# Altium PCB Flyback_PCB.PcbDoc
Units mm, origin at the board's own origin, x right, y up, seen from the top; angles counter-clockwise.
Board outline 112.01 x 26.16 mm, 2 copper layers (Top Layer, Bottom Layer); 26 components, 14 nets, 67 pads, 8 vias.
Unrouted connection lines stored in the file: 4.
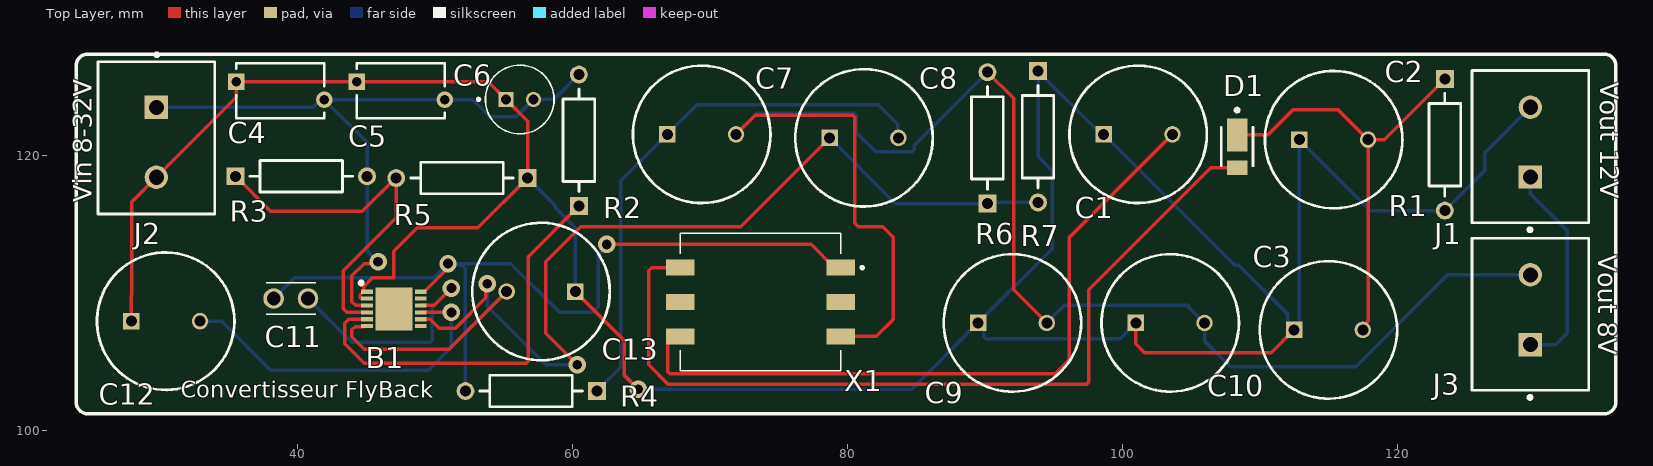
[diagram p0: Top Layer view]
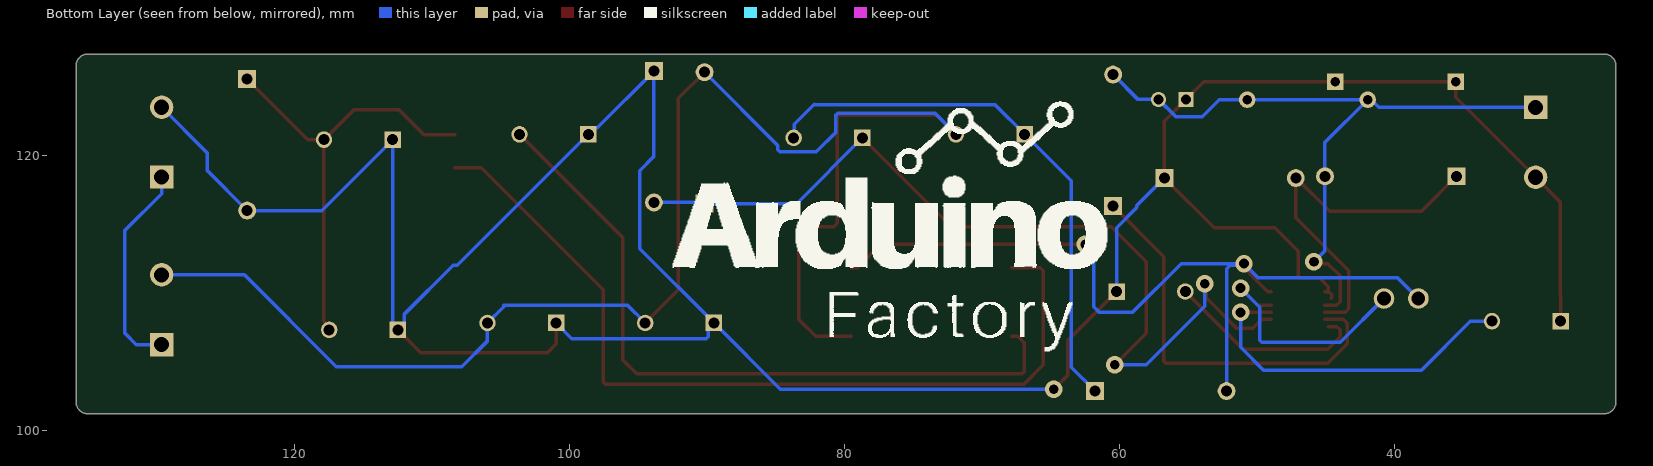
[diagram p1: Bottom Layer view, seen from below]

## Layer stack, top to bottom
Top Solder: solder mask 0.0102, Solder Resist, Dk 3.5
Top Layer: signal copper 0.0356
Dielectric 1: dielectric 0.32, FR-4, Dk 4.8
Bottom Layer: signal copper 0.0356
Bottom Solder: solder mask 0.0102, Solder Resist, Dk 3.5

## Board outline
23.876,102.073 23.876,126.527 cw(c24.73,126.527) 24.73,127.381 135.036,127.381 cw(c135.036,126.527) 135.89,126.527 135.89,102.073 cw(c135.036,102.073) 135.036,101.219 24.73,101.219 cw(c24.73,102.073)

## Design rules (kind name [scope] priority, off if disabled: settings)
Clearance Clearance_1 [OnMid vs OnMid] p1: gap=0.254 ignorepadtopadclearanceinfootprint=FALSE sourcerule=36 cellrowname=All cellrowtype=0 cellcolname=All cellcoltype=0 innerlayers=TRUE
Clearance Clearance_2 [(ExistsOnLayer('Top Layer') Or ExistsOnLayer('Bottom Layer')) vs (ExistsOnLayer('Top Layer') Or ExistsOnLayer('Bottom Layer'))] p2: gap=0.254 ignorepadtopadclearanceinfootprint=FALSE sourcerule=36 cellrowname=All cellrowtype=0 cellcolname=All cellcoltype=0 outerlayers=TRUE
Clearance [All] p3: gap=0.254 ignorepadtopadclearanceinfootprint=FALSE ismatrix=TRUE
ComponentClearance [All] p1: gap=0 collisioncheckmode=3 verticalgap=0 showdistances=FALSE
PolygonConnect [All] p1: connectstyle=Relief reliefconductorwidth=0.254 reliefentries=4 polygonreliefangle="90 Angle" airgapwidth=0.254
RoutingVias [All] p1: holewidth=0.711 width=1.27 viastyle="Through Hole" minholewidth=0.711 minwidth=1.27 maxholewidth=0.711 maxwidth=1.27
SolderMaskExpansion [All] p1: expansion=0.102 istentingtop=FALSE
Width [All] p1: maxlimit=0.254 minlimit=0.254 preferedwidth=0.254
29 further rules are at their usual default settings.

## Components (designator, comment, footprint, x,y, rotation, side; value= is the part's Value field where it differs from the comment)
B1 "LM5160ADNTT" SON50P400X400X100-13N 46.99,108.839 r0 top
C1 "2200pF" CAPPRD500W60D1000H1350 98.632,121.539 r0 top
C2 "10uF" CAPPRD500W60D1000H1350 112.856,121.158 r0 top
C3 "10uF" CAPPRD500W60D1000H1350 112.475,107.315 r0 top
C4 "2.2uF" Vishay_561R_0 38.735,124.714 r0 top
C5 "2.2uF" Vishay_561R_0 47.498,124.714 r0 top
C6 "0.47uF" CAPPRD200W50D550H1250 56.15,124.079 r0 top
C7 "1000pF" CAPPRD500W60D1000H1350 66.882,121.539 r0 top
C8 "0.1uF" CAPPRD500W60D1000H1350 78.693,121.285 r0 top
C9 "10 uF" CAPPRD500W60D1000H1350 89.488,107.823 r0 top
C10 "10 uF" CAPPRD500W60D1000H1350 100.965,107.823 r0 top
C11 "0.01uF" K104K10X7RF53H5 39.497,109.601 r0 top
C12 "1uF" CAPPRD500W60D1000H1350 27.893,107.95 r0 top
C13 "0.082uF" CAPPRD500W60D1000H1350 60.198,110.109 r180 top
D1 "Diode_Diodes_DFLS1100-7_eec" Diodes_DFLS1100-7_0 108.331,120.65 r90 top
J1 "282837-2" TE_282837-2_0 129.667,120.65 r90 top
J2 "282837-2" TE_282837-2_0 29.718,121.285 r270 top
J3 "282837-2" TE_282837-2_0 129.667,108.458 r90 top
R1 "2 Kohms" Stackpole_Electronics_Inc._CF14JT1K00_0 123.444,120.777 r270 top
R2 "301K" Stackpole_Electronics_Inc._CF14JT1K00_0 60.452,121.112 r90 top
R3 "127K" Stackpole_Electronics_Inc._CF14JT1K00_0 40.259,118.491 r0 top
R4 "51.1 Kohms" Stackpole_Electronics_Inc._CF14JT1K00_0 56.977,102.87 r180 top
R5 "10K" Stackpole_Electronics_Inc._CF14JT1K00_0 51.943,118.364 r180 top
R6 "6.04 Kohms" Stackpole_Electronics_Inc._CF14JT1K00_0 90.17,121.285 r90 top
R7 "2 Kohms" Stackpole_Electronics_Inc._CF14JT1K00_0 93.853,121.366 r270 top
X1 "750314597" 750314597 73.66,109.347 r180 top

## Footprints (in the part's own frame and the unit in brackets; to place one, negate y for a bottom-side part, rotate by r counter-clockwise, add the part's x,y. Pads: shape width x height; smd on the part's side, far side on the other; paste and mask are expansions set on the pad)
750314597 [mm]
  rect 2.08x1.17 smd: 1(-5.83,-2.5) 2(-5.83,0) 3(-5.83,2.5) 4(5.83,2.5) 5(5.83,0) 6(5.83,-2.5)
  silkscreen extent -7.5,-5 5.83,5
CAPPRD200W50D550H1250 [mm]
  rect 1.12x1.12 hole 0.72: 1(-1,0)
  round 1.12 hole 0.72: 2(1,0)
  silkscreen extent -3.1,-2.5 2.5,2.5
CAPPRD500W60D1000H1350 [mm]
  rect 1.2x1.2 / inner round 1.2 / far side rect 1.2x1.2 hole 0.8: 1(0,0)
  round 1.2 hole 0.8: 2(5,0)
  silkscreen extent -2.5,-5 7.5,5
Diodes_DFLS1100-7_0 [mm]
  rect 2.4x1.5 smd paste+0 mask+0: 1(0.85,0)
  rect 1.05x1.5 smd paste+0 mask+0: 2(-1.525,0)
  silkscreen extent -1.4,-1.15 2.77,1.15, body extent -2.15,-1.06 2.15,1.06, height 0.25
K104K10X7RF53H5 [mm]
  round 1.5 hole 1: 1(-1.25,0) 2(1.25,0)
  silkscreen extent -1.8,-1.15 1.8,1.15
SON50P400X400X100-13N [mm]
  rect 0.85x0.3 smd: 1(-1.95,1.25) 2(-1.95,0.75) 3(-1.95,0.25) 4(-1.95,-0.25) 5(-1.95,-0.75) 6(-1.95,-1.25) 7(1.95,-1.25) 8(1.95,-0.75) 9(1.95,-0.25) 10(1.95,0.25) 11(1.95,0.75) 12(1.95,1.25)
  rect 2.7x3.1 smd: 13(0,0)
  silkscreen extent -2.5,1.78 -2.25,2.02
Stackpole_Electronics_Inc._CF14JT1K00_0 [mm]
  rect 1.3x1.3 hole 0.8 paste-2539.97 mask+0: 1(-4.78,0)
  round 1.3 hole 0.8 paste-2539.97 mask+0: 2(4.78,0)
  silkscreen extent -3.73,-1.15 3.73,1.15, body extent -5.53,-1.4 5.53,1.4, height 0.25
TE_282837-2_0 [mm]
  rect 1.7x1.7 hole 1.1 paste-2539.97 mask+0: 1(-2.215,0)
  round 1.7 hole 1.1 paste-2539.97 mask+0: 2(2.865,0)
  silkscreen extent -6.17,-4.25 5.53,4.25, body extent -5.63,-4.35 5.63,4.35, height 0.25
Vishay_561R_0 [mm]
  rect 1.2x1.2 hole 0.7 paste-2539.97 mask+0: 1(-3.2,0.65)
  round 1.2 hole 0.7 paste-2539.97 mask+0: 2(3.2,-0.65)
  silkscreen extent -3.2,-2 3.2,2

## Part data
B1: "LM5160A Wide Input 65V, 2A Synchronous Buck / Fly-Buck Converter", Manufacturer_Name="Texas Instruments", Mouser Part Number=595-LM5160ADNTT, Arrow Part Number=LM5160ADNTT, Arrow Price/Stock=https://www.arrow.com/en/products/lm5160adntt/texas-instruments?region=nac, Datasheet Link=http://www.ti.com/lit/gpn/lm5160a, Geometry.Height=1mm, Manufacturer_Part_Number=LM5160ADNTT, Mouser Price/Stock=https://www.mouser.co.uk/ProductDetail/Texas-Instruments/LM5160ADNTT?qs=2iGeymVCXnWysiM%2FMZotQQ%3D%3D
C1 C2 C3 C4 C5 C6 C7 C8 C9 C10 C11 C12 C13: library part ESK227M050AH1EA, "220 F 50 V Aluminum Electrolytic Capacitors Radial, Can 2000 Hrs @ 85C", Manufacturer_Name=KEMET, Mouser Part Number=80-ESK227M050AH1EA, Arrow Part Number=ESK227M050AH1EA, Arrow Price/Stock=https://www.arrow.com/en/products/esk227m050ah1ea/kemet-corporation, Datasheet Link=https://connect.kemet.com:7667/gateway/IntelliData-ComponentDocumentation/1.0/download/datasheet/ESK227M050AH9EA.pdf, Geometry.Height=13.5mm, Manufacturer_Part_Number=ESK227M050AH1EA, Mouser Price/Stock=https://www.mouser.co.uk/ProductDetail/KEMET/ESK227M050AH1EA?qs=w9hhVRgtvfnOjgdKRGLJ5g%3D%3D
D1: "DIODE SCHOTTKY 100V POWERDI123", Current - Average Rectified (Io)=1A, Digikey Part Number=DFLS1100DICT-ND, Manufacturer=Diodes, Mouser Part Number=621-DFLS1100-7, Package=POWERDI123, Part Number=DFLS1100-7, Temperature="-55°C to +175°C", Temperature Range High=+175°C, Temperature Range Low=-55°C, Voltage=100V, Voltage - Forward (Vf) (Max) @ If="770mV @ 1A", ComponentLink1Description=Upverter, ComponentLink1URL=https://upverter.com/upn/revision/a54e2f16c552ac68/, ComponentLink2Description=Datasheet, ComponentLink2URL=http://www.diodes.com/_files/datasheets/ds30497.pdf, Digikey Description="DIODE SCHOTTKY 100V POWERDI123", Diode Type=Schottky, helpURL=https://upverter.com/upn/revision/a54e2f16c552ac68/, Lead Free=yes, Price=0.251806392522, RoHS=TRUE, Supplier 1=Digi-Key, Supplier 2=Mouser, Supplier Part Number 1=DFLS1100DICT-ND, Supplier Part Number 2=621-DFLS1100-7
R1 R2 R3 R4 R5 R6 R7: library part MF0207FTE52-10K
X1: "Power Transformers MID-ITIFBK 3.87W SMD Power Transformer", Manufacturer_Name="Wurth Elektronik", Mouser Part Number=710-750314597, Datasheet Link=https://katalog.we-online.de/ctm/datasheet/750314597.pdf, Geometry.Height=8.64mm, Manufacturer_Part_Number=750314597, Mouser Price/Stock=https://www.mouser.co.uk/ProductDetail/Wurth-Elektronik/750314597?qs=Bi9WzwbfiOje7VZ5JZKdqA%3D%3D

## Via types
v1: diameter 1.27, hole 0.711, Top Layer to Bottom Layer, 8 vias

## Nets (pads, with @x,y where several pads share a name; then routed paths per layer and width w, separated by ;. In a path a pad name is that pad's centre, name@x,y a point inside that pad or via, vN(x,y) a via of type N, cw(c..) or ccw(c..) an arc to the next point about the centre after c; other vN are vias at no path point)
EN: B1.4 R3.1 R5.2 | length 26.7
  Top Layer w0.254: R3.1 38.019,115.951 44.704,115.951 47.117,118.364 R5.2 47.163,115.489 43.307,111.633 43.307,108.861 43.579,108.589 B1.4
FB: B1.8 C8.1 R6.1 R7.2 | length 66.9
  Top Layer w0.254: B1.8@48.94,108.081 49.653,108.081 50.292,107.442 51.475,107.442 53.69,109.657 53.69,110.577 v1(53.786,110.673) ; v1(60.325,104.775) 58.039,107.061 58.039,112.268 60.579,114.808 72.216,114.808 C8.1
  Bottom Layer w0.254: v1(53.786,110.673) 53.786,109.028 58.039,104.775 v1(60.325,104.775) ; C8.1 83.473,116.505 R6.1 90.251,116.586 R7.2
GND: B1.1 B1.2 B1.13 C1.1 C2.1 C3.1 C4.1 C5.1 C6.1 C9.1 C10.1 C12.1 C13.1 J1.1 J1.2 J2.2 J3.1 R1.2 R5.1 R7.1 | length 236.9
  Top Layer w0.254: C12.1 27.893,109.808 27.94,109.855 27.94,116.642 J2.2 35.535,124.237 C4.1 C5.1 53.865,125.364 C6.1 56.723,122.506 R5.1 53.104,114.745 48.704,114.745 46.99,113.03 46.99,111.125 45.466,111.125 44.789,110.448 B1.1@44.789,110.112 ; 44.577,109.62 44.542,109.655 44.542,109.866 44.764,110.088 44.809,110.088 44.831,110.066 44.854,110.089 B1.1 ; C13.1 63.766,106.541 63.766,104.001 v1(64.77,102.997) ; C10.1 100.965,106.299 101.6,105.664 110.824,105.664 C3.1
  Bottom Layer w0.254: R5.1 58.722,116.365 58.722,116.223 60.198,114.747 C13.1 ; v1(64.77,102.997) 84.662,102.997 C9.1 ; C10.1 99.822,106.68 90.065,106.68 89.916,106.829 89.916,107.395 C9.1 ; J3.1 131.516,106.243 132.334,107.061 132.334,114.554 129.667,117.221 J1.1 ; J1.2 126.365,120.213 126.365,118.918 R1.2 118.017,115.997 C2.1 112.856,107.696 C3.1 112.002,107.788 112.002,108.47 108.458,112.014 108.157,112.014 C1.1 98.159,122.012 97.987,122.012 R7.1 93.853,119.937 94.884,118.906 94.884,113.219 C9.1
NetB1_6: B1.6 C13.2 | length 14.8
  Top Layer w0.254: B1.6@44.809,107.558 44.185,107.558 43.942,107.315 43.942,106.807 44.831,105.918 51.007,105.918 C13.2
NetB1_7: B1.7 B1.9 C12.2 | length 25.2
  Top Layer w0.254: B1.9 51.177,108.589 v1(51.181,108.585)
  Bottom Layer w0.254: C12.2 34.464,107.95 38.02,104.394 49.508,104.394 51.181,106.067 v1(51.181,108.585)
NetB1_10: B1.10 C11.2 | length 17.5
  Top Layer w0.254: B1.10@48.94,109.097 49.923,109.097 51.181,110.355 v1(51.181,110.359)
  Bottom Layer w0.254: C11.2 43.922,106.426 49.635,106.426 49.784,106.575 49.784,108.958 51.181,110.355 v1(51.181,110.359)
NetC1_2: C1.2 X1.4 | length 52.4
  Top Layer w0.254: X1.4 67.375,106.847 66.917,106.389 66.917,105.333 66.907,105.323 66.907,104.267 67.056,104.118 95.101,104.118 96.139,105.156 96.139,114.046 C1.2
NetC2_2: C2.2 C3.2 D1.1 R1.1 | length 32.6
  Top Layer w0.254: D1.1 110.578,121.5 112.395,123.317 115.697,123.317 C2.2 ; C3.2 117.475,107.571 117.856,107.952 C2.2 ; R1.1 119.045,121.158 C2.2
NetC7_1: C7.1 C8.2 R4.1 | length 40.1
  Bottom Layer w0.254: R4.1 63.5,104.613 63.5,118.157 C7.1 69.041,123.698 82.169,123.698 82.191,123.72 83.645,122.266 83.645,121.333 C8.2
NetD1_2: D1.2 X1.6 | length 63.1
  Top Layer w0.254: X1.6 65.746,111.847 65.532,111.633 65.532,104.775 66.929,103.378 97.387,103.378 97.536,103.527 97.536,110.236 106.425,119.125 D1.2
RON: B1.5 R2.1 | length 30
  Top Layer w0.254: B1.5@45.04,108.081 43.714,108.081 43.434,107.801 43.434,106.299 44.831,104.902 56.62,104.902 56.769,105.051 56.769,112.649 R2.1
SW_2: B1.11 B1.12 C11.1 R4.2 X1.1 | length 62.3
  Top Layer w0.254: B1.12 49.215,110.089 50.737,111.611 50.737,111.943 v1(50.931,112.137) ; v1(62.484,113.538) 77.344,113.538 79.035,111.847 X1.1
  Bottom Layer w0.254: C11.1 39.771,111.125 49.919,111.125 v1(50.931,112.137) ; R4.2@52.324,102.743 R4.2 52.197,111.76 51.947,112.01 51.058,112.01 v1(50.931,112.137) ; v1(62.484,113.538) 62.484,113.333 61.868,112.717 61.868,109.007 61.446,108.585 59.055,108.585 55.503,112.137 v1(50.931,112.137)
VIN: B1.3 C4.2 C5.2 C6.2 J2.1 R2.2 R3.2 | length 51.6
  Top Layer w0.254: B1.3@45.04,109.097 44.214,109.097 43.942,109.369 43.942,111.252 44.831,112.141 45.72,112.141 v1(45.847,112.268)
  Bottom Layer w0.254: J2.1 41.115,123.5 41.679,124.064 C4.2 ; v1(45.847,112.268) 45.039,113.076 R3.2 45.039,120.96 C4.2 ; R2.2 58.639,124.079 C6.2 55.88,122.809 53.975,122.809 52.72,124.064 C5.2 C4.2
Vout: C7.2 C9.2 C10.2 J3.2 R6.2 X1.3 | length 115.1
  Top Layer w0.254: C7.2 73.279,122.936 80.369,122.936 80.518,122.787 80.518,115.062 80.772,114.808 82.55,114.808 83.312,114.046 83.312,108.077 82.082,106.847 X1.3 ; R6.2 92.075,124.16 92.075,110.236 C9.2
  Bottom Layer w0.254: C7.2 73.406,123.063 80.496,123.063 80.645,122.914 80.645,121.666 82.042,120.269 84.687,120.269 84.836,120.418 84.836,120.731 R6.2 ; C9.2 95.758,109.093 104.775,109.093 104.775,109.013 C10.2 105.965,106.506 107.823,104.648 116.967,104.648 123.642,111.323 J3.2
pads on no net: X1.2 X1.5

## Silkscreen, mask and mechanical layers (free items; w line width, h text height)
Top Overlay:
  the board outline again, w0.254
  text "Vout 12V" at 134.263,125.349 h2.32 r270
  text "Vin 8-32V" at 25.499,116.586 h2.32 r90
  text "Vout 8V" at 134.14,112.776 h2.32 r270
  text "Convertisseur FlyBack" at 31.496,101.982 h2.02
Bottom Overlay:
  drawing of 14 lines, arcs and shapes, not listed